# EAGLE board main_board_old (EAGLE 9.6.0)
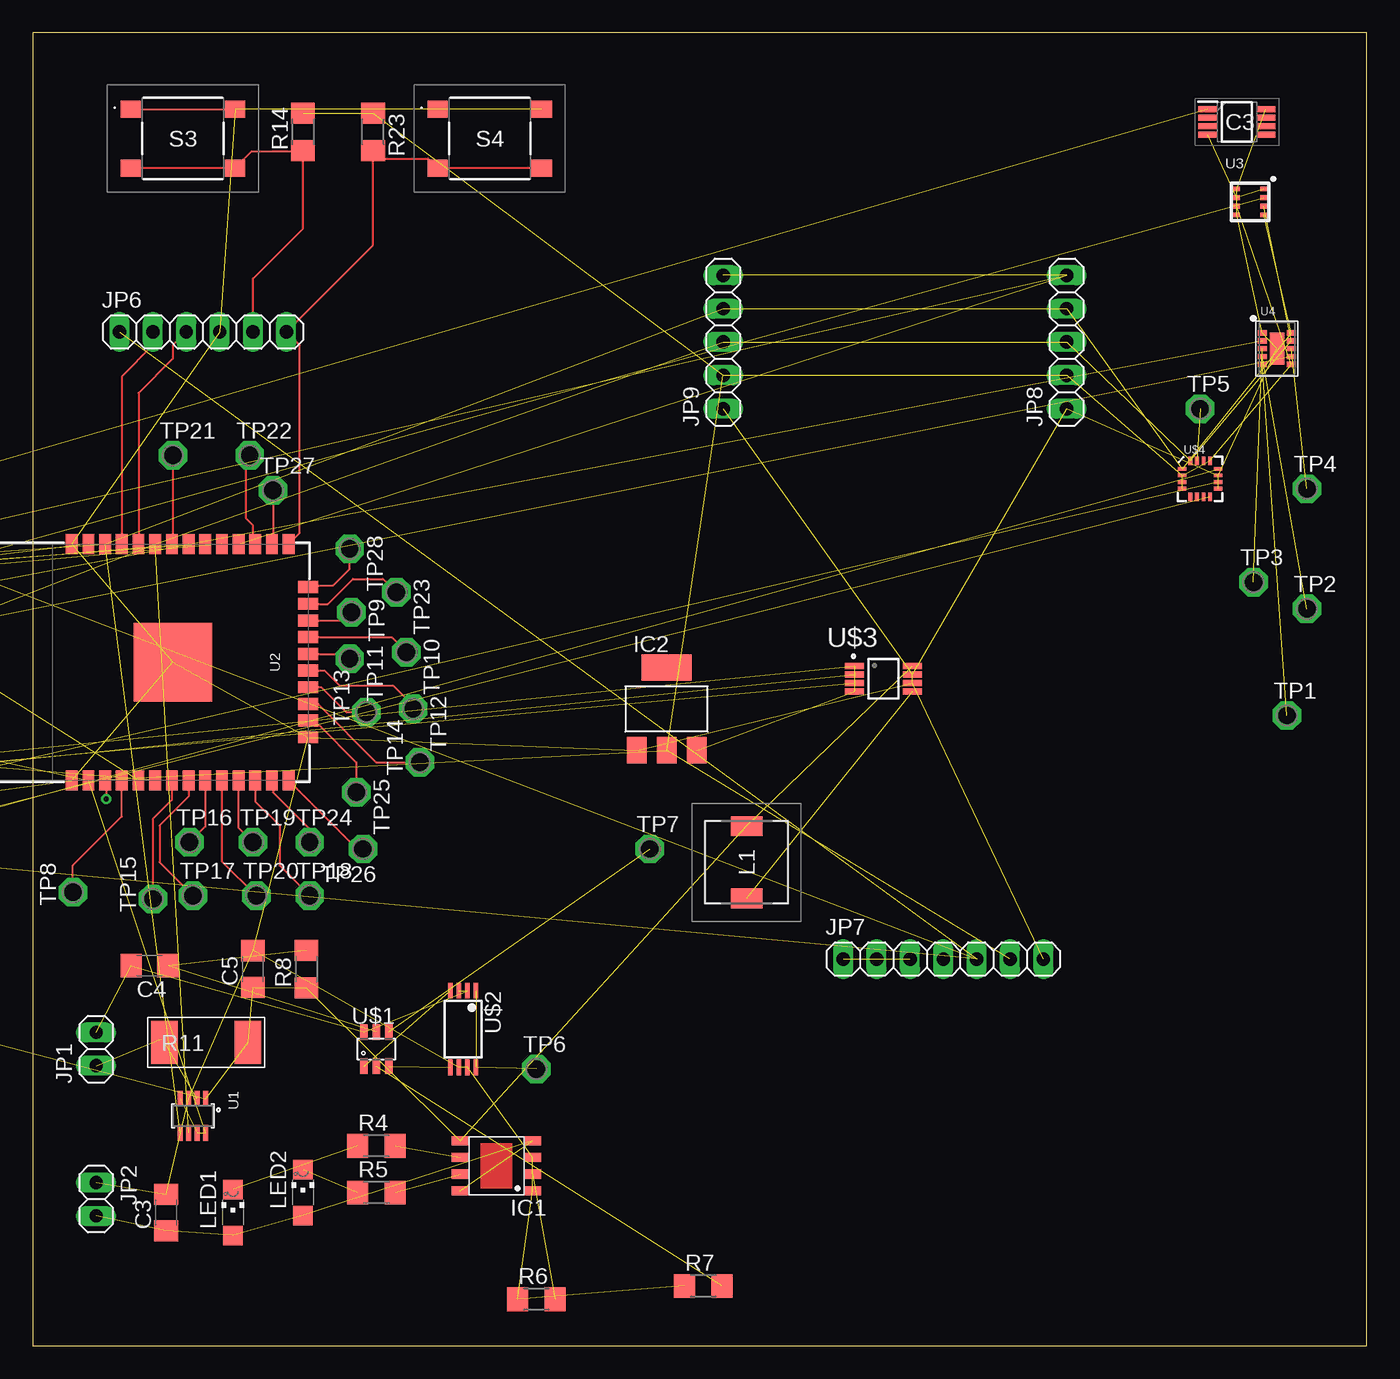
[diagram p0: board, top side]
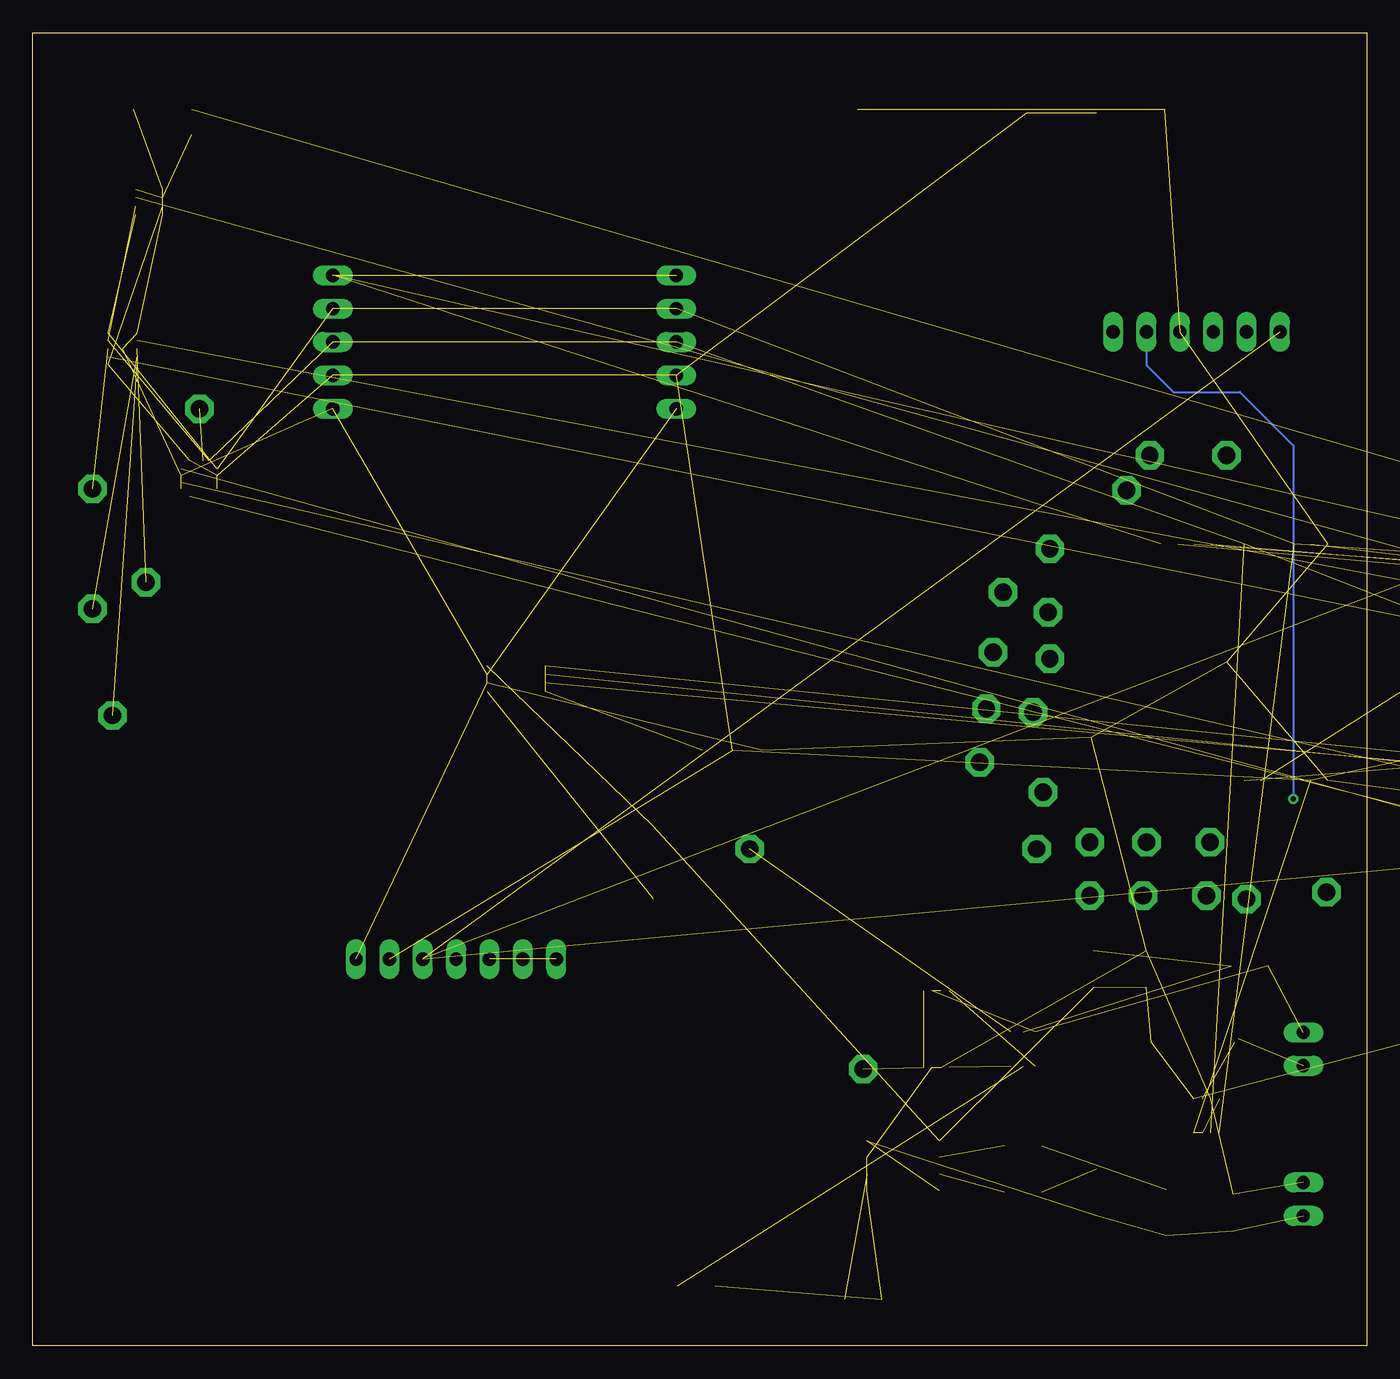
[diagram p1: board, bottom side, seen from below]

Size 101.58 x 100 mm. Coordinates in mm from the lower left corner, seen from the top.
Outline: 0,0 101.58,0 101.58,100 0,100 0,0
Copper layers (1*16): Top 0.035mm / dielectric 1.5mm / Bottom 0.035mm
Design rules "default": minimum track width 6mil, minimum drill 0.35mm, track to track 6mil, track to pad 6mil, pad to pad 6mil, via to via 6mil, smd to smd 6mil, copper to edge 40mil, drill to drill 6mil, minimum pad ring 10mil, minimum via ring 8mil, stop-mask expansion 4mil, vias tented up to drill 0mil, thermal gap 10mil

## Footprints (pad centres in the part's own frame; a part is rotated, then mirrored left to right if it is on the bottom)
C1206 = smd 1.6 x 1.8: 1 -1.4,0; 2 1.4,0
SOP-8 = smd 1.3 x 0.7: 1 -2.75,1.905; 2 -2.75,0.635; 3 -2.75,-0.635; 4 -2.75,-1.905; 5 2.75,-1.905; 6 2.75,-0.635; 7 2.75,0.635; 8 2.75,1.905
SOT223 = smd 1.499 x 2.007: 1 -2.261,-3.15; 2 0.025,-3.15; 3 2.311,-3.15 | smd 3.81 x 2.007: 4 0,3.15
SOP65P490X110-8N = smd 1.425 x 0.45: 1 -2.212,0.975; 2 -2.212,0.325; 3 -2.212,-0.325; 4 -2.212,-0.975; 5 2.212,-0.975; 6 2.212,-0.325; 7 2.212,0.325; 8 2.212,0.975
1X02 = drill 1.016 long: 1 -1.27,0; 2 1.27,0
1X08 = drill 1.016 long: 1 -8.89,0; 2 -6.35,0; 3 -3.81,0; 4 -1.27,0; 5 1.27,0; 6 3.81,0; 7 6.35,0; 8 8.89,0
1X03 = drill 1.016 long: 1 -2.54,0; 2 0,0; 3 2.54,0
1X06 = drill 1.016 long: 1 -6.35,0; 2 -3.81,0; 3 -1.27,0; 4 1.27,0; 5 3.81,0; 6 6.35,0
1X07 = drill 1.016 long: 1 -7.62,0; 2 -5.08,0; 3 -2.54,0; 4 0,0; 5 2.54,0; 6 5.08,0; 7 7.62,0
1X05 = drill 1.016 long: 1 -5.08,0; 2 -2.54,0; 3 0,0; 4 2.54,0; 5 5.08,0
B82462G4472M = smd 1.5 x 2.4: 1 -2.75,0; 2 2.75,0
CHIPLED_1206 = smd 1.5 x 1.5: A 0,-1.75; C 0,1.75
R1206 = smd 1.6 x 1.803: 1 -1.422,0; 2 1.422,0
R2512 = smd 2.032 x 3.302: 1 -3.175,0; 2 3.175,0
222AMVAAR = smd 1.55 x 1.3: 1 -3.975,2.25; 2 -3.975,-2.25; 3 3.975,2.25; 4 3.975,-2.25
P1-13 = drill 1.321 pad 2.159 octagon: TP 0,0
SOT23-8 = smd 1.2 x 0.4: 1 -1.3,0.975; 2 -1.3,0.325; 3 -1.3,-0.325; 4 -1.3,-0.975; 5 1.3,-0.975; 6 1.3,-0.325; 7 1.3,0.325; 8 1.3,0.975
ESP-WROOM-32 = smd 0.9 x 1.5: 1 7.7,9; 2 6.43,9; 3 5.16,9; 4 3.89,9; 5 2.62,9; 6 1.35,9; 7 0.08,9; 8 -1.19,9; 9 -2.46,9; 10 -3.73,9; 11 -5,9; 12 -6.27,9; 13 -7.54,9; 14 -8.81,9; 25 -8.81,-9; 26 -7.54,-9; 27 -6.27,-9; 28 -5,-9; 29 -3.73,-9; 30 -2.46,-9; 31 -1.19,-9; 32 0.08,-9; 33 1.35,-9; 34 2.62,-9; 35 3.89,-9; 36 5.16,-9; 37 6.43,-9; 38 7.7,-9 | smd 1.5 x 0.9: 15 -10.3,5.715; 16 -10.3,4.445; 17 -10.3,3.175; 18 -10.3,1.905; 19 -10.3,0.635; 20 -10.3,-0.635; 21 -10.3,-1.905; 22 -10.3,-3.175; 23 -10.3,-4.445; 24 -10.3,-5.715 | smd 6 x 6: GND 0,0
BME280_LGA = smd 0.5 x 0.35: P$1 1.025,0.975; P$2 1.025,0.325; P$3 1.025,-0.325; P$4 1.025,-0.975; P$5 -1.025,-0.975; P$6 -1.025,-0.325; P$7 -1.025,0.325; P$8 -1.025,0.975
LGA10 = smd 0.7 x 0.4: 1 -1.1,1.2; 2 -1.1,0.6; 3 -1.1,0; 4 -1.1,-0.6; 5 -1.1,-1.2; 6 1.1,-1.2; 7 1.1,-0.6; 8 1.1,0; 9 1.1,0.6; 10 1.1,1.2 | smd 1.1 x 2.45: EP 0,0
SOT23-6 = smd 0.55 x 1.2: 1 -0.95,-1.3; 2 0,-1.3; 3 0.95,-1.3; 4 0.95,1.3; 5 0,1.3; 6 -0.95,1.3
TSSOP8 = smd 1.2 x 0.35: 1 -2.925,0.975; 2 -2.925,0.325; 3 -2.925,-0.325; 4 -2.925,-0.975; 5 2.925,-0.975; 6 2.925,-0.325; 7 2.925,0.325; 8 2.925,0.975
MCP1642B = smd 1.45 x 0.45: EN -2.2,0.975; NC -2.2,0.325; PG -2.2,-0.325; PGND 2.2,-0.325; SGND 2.2,0.325; SW 2.2,-0.975; VIN 2.2,0.975; VOUT -2.2,-0.975
SPARKFUN_16LPCC = smd 0.65 x 0.28: 1 -1.37,0.75; 2 -1.37,0.25; 3 -1.37,-0.25; 4 -1.37,-0.75; 9 1.37,-0.75; 10 1.37,-0.25; 11 1.37,0.25; 12 1.37,0.75 | smd 0.28 x 0.65: 5 -0.75,-1.37; 6 -0.25,-1.37; 7 0.25,-1.37; 8 0.75,-1.37; 13 0.75,1.37; 14 0.25,1.37; 15 -0.25,1.37; 16 -0.75,1.37

## Placement (x,y rotation side)
C1  4.7uF  [C1206]  -39.37,33.02 0 top  (outside the outline)
C2  10uF  [C1206]  -22.86,40.64 0 top  (outside the outline)
C3  0.1uF  [C1206]  10.16,10.16 90 top
C4  0.1uF  [C1206]  8.89,28.96 180 top
C5  10uF  [C1206]  16.76,28.7 90 top
C6  0.1uF  [C1206]  -58.42,33.02 0 top  (outside the outline)
C7  0.1uF  [C1206]  -64.77,33.02 0 top  (outside the outline)
C8  0.1uF  [C1206]  -71.12,33.02 0 top  (outside the outline)
C9  4.7uF  [C1206]  -16.51,40.64 0 top  (outside the outline)
C10  0.22uF  [C1206]  -33.02,33.02 0 top  (outside the outline)
IC1  TP4056  [SOP-8]  35.31,13.72 180 top
IC2  REG1117  [SOT223]  48.26,48.51 0 top
IC3  DS18B20U+  [SOP65P490X110-8N]  91.69,93.22 0 top
JP1  [1X02]  4.83,22.61 90 top
JP2  [1X02]  4.83,11.18 270 top
JP3  [1X08]  -24.13,58.42 0 top  (outside the outline)
JP4  [1X03]  -17.78,64.77 0 top  (outside the outline)
JP5  [1X03]  -26.16,64.77 0 top  (outside the outline)
JP6  [1X06]  12.95,77.22 0 top
JP7  [1X07]  69.34,29.46 0 top
JP8  [1X05]  78.74,76.45 90 top
JP9  [1X05]  52.58,76.45 90 top
L1  B82462G4472M  [B82462G4472M]  54.36,36.83 270 top
LED1  GREEN  [CHIPLED_1206]  15.24,10.16 0 top
LED2  RED  [CHIPLED_1206]  20.57,11.68 0 top
R1  976k  [R1206]  -35.56,40.64 0 top  (outside the outline)
R2  309k  [R1206]  -41.91,40.64 0 top  (outside the outline)
R3  1M  [R1206]  -46.99,40.64 0 top  (outside the outline)
R4  1k  [R1206]  26.16,15.24 0 top
R5  1k  [R1206]  26.16,11.68 0 top
R6  1.2k  [R1206]  38.35,3.56 0 top
R7  1k  [R1206]  51.05,4.57 0 top
R8  100  [R1206]  20.83,28.7 90 top
R9  10k  [R1206]  -15.24,46.99 0 top  (outside the outline)
R10  10k  [R1206]  -20.32,46.99 0 top  (outside the outline)
R11  0.1R ±1%(PT2512FK-070R1L)  [R2512]  13.21,23.11 0 top
R12  4.7k  [R1206]  -25.4,46.99 0 top  (outside the outline)
R13  4.7k  [R1206]  -30.48,46.99 0 top  (outside the outline)
R14  10k  [R1206]  20.57,92.46 90 top
R15  4.7k  [R1206]  -40.64,46.99 0 top  (outside the outline)
R16  4.7k  [R1206]  -45.72,46.99 0 top  (outside the outline)
R17  4.7k  [R1206]  -50.8,46.99 0 top  (outside the outline)
R18  4.7k  [R1206]  -55.88,46.99 0 top  (outside the outline)
R19  10k  [R1206]  -60.96,46.99 0 top  (outside the outline)
R20  10k  [R1206]  -66.04,46.99 0 top  (outside the outline)
R21  4.7k  [R1206]  -71.12,46.99 0 top  (outside the outline)
R22  10k  [R1206]  -15.24,53.34 0 top  (outside the outline)
R23  10k  [R1206]  25.91,92.46 270 top
S3  222AMVAAR  [222AMVAAR]  11.43,91.95 0 top
S4  222AMVAAR  [222AMVAAR]  34.8,91.95 0 top
TP1  TPPAD1-13  [P1-13]  95.5,48.01 0 top
TP2  TPPAD1-13  [P1-13]  97.03,56.13 0 top
TP3  TPPAD1-13  [P1-13]  92.96,58.17 0 top
TP4  TPPAD1-13  [P1-13]  97.03,65.28 0 top
TP5  TPPAD1-13  [P1-13]  88.9,71.37 0 top
TP6  TPPAD1-13  [P1-13]  38.35,21.08 0 top
TP7  TPPAD1-13  [P1-13]  46.99,37.85 0 top
TP8  TPPAD1-13  [P1-13]  3.05,34.54 90 top
TP9  TPPAD1-13  [P1-13]  24.26,55.88 270 top
TP10  TPPAD1-13  [P1-13]  28.45,52.83 270 top
TP11  TPPAD1-13  [P1-13]  24.13,52.32 270 top
TP12  TPPAD1-13  [P1-13]  28.96,48.51 270 top
TP13  TPPAD1-13  [P1-13]  25.4,48.26 90 top
TP14  TPPAD1-13  [P1-13]  29.46,44.45 90 top
TP15  TPPAD1-13  [P1-13]  9.14,34.04 90 top
TP16  TPPAD1-13  [P1-13]  11.94,38.35 0 top
TP17  TPPAD1-13  [P1-13]  12.19,34.29 0 top
TP18  TPPAD1-13  [P1-13]  21.08,34.29 0 top
TP19  TPPAD1-13  [P1-13]  16.76,38.35 0 top
TP20  TPPAD1-13  [P1-13]  17.02,34.29 0 top
TP21  TPPAD1-13  [P1-13]  10.67,67.82 0 top
TP22  TPPAD1-13  [P1-13]  16.51,67.82 0 top
TP23  TPPAD1-13  [P1-13]  27.69,57.4 270 top
TP24  TPPAD1-13  [P1-13]  21.08,38.35 0 top
TP25  TPPAD1-13  [P1-13]  24.64,42.16 270 top
TP26  TPPAD1-13  [P1-13]  25.15,37.85 180 top
TP27  TPPAD1-13  [P1-13]  18.29,65.15 0 top
TP28  TPPAD1-13  [P1-13]  24.13,60.71 270 top
TP29  TPPAD1-13  [P1-13]  -32.51,73.91 0 top  (outside the outline)
TP30  TPPAD1-13  [P1-13]  -39.88,73.91 0 top  (outside the outline)
U1  [SOT23-8]  12.19,17.53 270 top
U2  ESP-WROOM-32  [ESP-WROOM-32]  10.67,52.07 180 top
U3  BME280  [BME280_LGA]  92.71,87.12 0 top
U4  CCS811  [LGA10]  94.74,75.95 0 top
U$1  DW01A  [SOT23-6]  26.16,22.61 0 top
U$2  FS8205A  [TSSOP8]  32.77,24.13 270 top
U$3  MCP1642B  [MCP1642B]  64.77,50.8 0 top
U$4  SPARKFUN_HMC5883LSMD  [SPARKFUN_16LPCC]  88.9,66.04 0 top

## Library data of the parts
C1-C10 LED1 LED2 R1-R10 R12-R23 = adafruit
IC1 = TP4056
IC2 = burr-brown; MPN: REG1117; OC_FARNELL: 1097566; OC_NEWARK: 14P6981
IC3 = SamacSys_Parts; DESCRIPTION: Board Mount Temperature Sensors Prgmble Resolution 1-Wire Parasite Pwr; HEIGHT: 1.1mm; MANUFACTURER_NAME: Maxim Integrated; MANUFACTURER_PART_NUMBER: DS18B20U+; MOUSER_PART_NUMBER: 700-DS18B20U; MOUSER_PRICE-STOCK: https://www.mouser.co.uk/ProductDetail/Maxim-Integrated/DS18B20U%2b?qs=7H2Jq%252ByxpJLxAEcPXZtrFQ%3D%3D
JP1-JP9 = pinhead
L1 = SamacSys_Parts; DESCRIPTION: EPCOS - B82462G4472M - Power Inductor (SMD), 4.7 H, 2 A, Shielded, 1.8 A, B82462G4 Series, 6.3mm x 6.3mm x 3mm; HEIGHT: 3mm; MANUFACTURER_NAME: TDK; MANUFACTURER_PART_NUMBER: B82462G4472M; MOUSER_PART_NUMBER: 871-B82462G4472M; MOUSER_PRICE-STOCK: https://www.mouser.co.uk/ProductDetail/EPCOS-TDK/B82462G4472M?qs=%2FkiEPUfD%2FqlqVwkhXJ4rDg%3D%3D
R11 = RCL_INA219
S3 S4 = SamacSys_Parts; DESCRIPTION: Tactile Switches Gull Wing AF 160gf Act. Dir. Vertical ,,; HEIGHT: 4.3mm; MANUFACTURER_NAME: CTS; MANUFACTURER_PART_NUMBER: 222AMVAAR; MOUSER_PART_NUMBER: 774-222AMVAAR; MOUSER_PRICE-STOCK: https://www.mouser.co.uk/ProductDetail/CTS-Electronic-Components/222AMVAAR?qs=%252BiOMRfgENTFbKNF5p%2FmyFQ%3D%3D
TP1-TP30 = testpad
U1 = IC_INA219
U2 = SparkFun-RF_ESP; PROD_ID: IC-13849
U3 = BME280ComponentLibrary; PROD_ID: IC-13090
U4 = CCS811_Breakout_Temp; PROD_ID: IC-13607
U$1 = DW01A
U$2 = SparkFun_FS8205A
U$3 = MCP1642B
U$4 = SparkFun_HMC5883L_Breakout_v12

## Nets
+3V3: C6.1 C7.1 C8.1 IC2.2 IC3.8 JP3.3 JP5.1 JP7.6 JP8.2 JP9.2 R9.2 R10.2 R12.2 R13.2 R14.2 R17.2 R18.1 R19.2 R20.1 R21.2 R23.1 U1.4 U1.7 U1.8 U2.2 U3.P$6 U3.P$8 U4.6 U$4.2 U$4.4 U$4.13
+5V: C2.1 IC2.3 JP4.1 JP6.1 JP7.5 R1.2 R3.1 U$3.EN U$3.VOUT
BATT+: C1.1 C5.1 IC1.5 L1.1 R8.1 R11.2 U1.1 U$3.VIN
BATT-: C4.2 JP1.2 U$1.6 U$2.2 U$2.3
GND: C1.2 C2.2 C3.2 C5.2 C6.2 C7.2 C8.2 C9.2 IC1.1 IC1.3 IC2.1 IC3.4 JP2.1 JP3.4 JP4.3 JP5.3 JP6.4 JP7.7 JP8.1 JP9.1 R2.1 R6.1 R7.1 R9.1 R10.1 R16.1 R18.2 R20.2 R22.1 S3.1 S3.3 S4.1 S4.3 U1.3 U2.1 U2.15 U2.38 U2.GND U3.P$1 U3.P$5 U3.P$7 U4.1 U4.EP U$2.6 U$2.7 U$3.PGND U$3.SGND U$4.9 U$4.11
GND1: JP7.4
GPIO17: IC3.1 JP8.5 JP9.5 R21.1 U2.28
N$1: R1.1 R2.2 U$3.NC
N$2: R3.2 U$3.PG
N$3: L1.2 U$3.SW
N$4: IC1.6 R4.2
N$5: IC1.7 R5.2
N$6: LED2.C R5.1
N$7: LED1.C R4.1
N$8: U$1.3 U$2.5
N$9: U$1.1 U$2.4
N$10: IC1.2 R6.2
N$11: R7.2 U$1.2
N$12: C4.1 R8.2 U$1.5
N$13: JP1.1 R11.1 U1.2
N$14: JP3.8 U2.29
N$15: JP3.7 U2.37
N$16: JP3.6 U2.31
N$17: JP3.5 U2.30
N$18: JP6.5 R14.1 S3.2 S3.4 U2.3
N$19: JP6.2 U2.35
N$20: JP6.3 U2.34
N$21: JP5.2 U2.5
N$22: JP6.6 R23.2 S4.2 S4.4 U2.25
N$23: JP4.2 R15.1
N$24: R15.2 R16.2 U2.6
N$25: R17.1 U3.P$2
N$26: R19.1 U4.2
N$27: C10.1 U$4.8
N$28: C10.2 U$4.12
N$29: R22.2 U4.7
N$30: C9.1 U$4.10
N$31: TP1.TP U4.5
N$32: TP2.TP U4.4
N$33: TP3.TP U4.3
N$34: TP4.TP U4.8
N$35: TP5.TP U$4.15
N$36: TP7.TP U$1.4
N$37: TP6.TP U$2.1 U$2.8
N$38: TP28.TP U2.24
N$39: TP27.TP U2.26
N$40: TP26.TP U2.14
N$41: TP25.TP U2.16
N$42: TP24.TP U2.13
N$43: TP23.TP U2.23
N$44: TP22.TP U2.27
N$45: TP21.TP U2.32
N$46: TP20.TP U2.10
N$47: TP19.TP U2.11
N$48: TP18.TP U2.12
N$49: TP17.TP U2.8
N$50: TP16.TP U2.9
N$51: TP15.TP U2.7
N$52: TP14.TP U2.17
N$53: TP13.TP U2.18
N$54: TP12.TP U2.19
N$55: TP11.TP U2.20
N$56: TP10.TP U2.21
N$57: TP9.TP U2.22
N$58: TP8.TP U2.4
SCL: JP3.1 JP8.4 JP9.4 R13.1 TP29.TP U1.5 U2.36 U3.P$4 U4.10 U$4.1
SDA: JP3.2 JP8.3 JP9.3 R12.1 TP30.TP U1.6 U2.33 U3.P$3 U4.9 U$4.16
SOLAR+: C3.1 IC1.4 IC1.8 JP2.2 LED1.A LED2.A
VCC: JP7.1 JP7.2 JP7.3

## Tracks (layer width: path | path; a pad name or v marks a point on that pad's centre or on a via)
+3V3  (30 unrouted)
+5V  (8 unrouted)
BATT+  (7 unrouted)
BATT-  (4 unrouted)
GND  (47 unrouted)
  Top 0.152: S3.1 S3.3
GPIO17  (4 unrouted)
N$1  (2 unrouted)
N$2  (1 unrouted)
N$3  (1 unrouted)
N$4  (1 unrouted)
N$5  (1 unrouted)
N$6  (1 unrouted)
N$7  (1 unrouted)
N$8  (1 unrouted)
N$9  (1 unrouted)
N$10  (1 unrouted)
N$11  (1 unrouted)
N$12  (2 unrouted)
N$13  (2 unrouted)
  Top 0.152: R11.1 9.78,23.37
N$14  (1 unrouted)
N$15  (1 unrouted)
N$16  (1 unrouted)
N$17  (1 unrouted)
N$18  (via drill 0.35)
  Top 0.152: JP6.5 16.76,81.28 20.57,85.09 R14.1 20.47,90.93 16.64,90.93 S3.4 S3.2 | U2.3 5.59,42.99 v5.59,41.66
  Bottom 0.152: JP6.5 16.76,74.68 14.73,72.64 9.65,72.64 5.59,68.58 v5.59,41.66
N$19
  Top 0.152: JP6.2 9.14,76.2 6.78,73.83 U2.35
N$20
  Top 0.152: JP6.3 10.67,76.2 10.67,75.18 8.05,72.56 U2.34
N$21  (1 unrouted)
N$22
  Top 0.152: U2.25 20.32,61.91 20.32,76.2 JP6.6 25.91,83.82 R23.2 26.52,90.42 30.1,90.42 S4.2 S4.4
N$23  (1 unrouted)
N$24  (2 unrouted)
N$25  (1 unrouted)
N$26  (1 unrouted)
N$27  (1 unrouted)
N$28  (1 unrouted)
N$29  (1 unrouted)
N$30  (1 unrouted)
N$31  (1 unrouted)
N$32  (1 unrouted)
N$33  (1 unrouted)
N$34  (1 unrouted)
N$35  (1 unrouted)
N$36  (1 unrouted)
N$37  (2 unrouted)
N$38
  Top 0.152: U2.24 21.09,57.91 22.86,57.91 24.13,59.18 TP28.TP
N$39
  Top 0.152: TP27.TP 18.29,61.15 U2.26
N$40
  Top 0.152: U2.14 24.7,37.85 TP26.TP
N$41
  Top 0.152: U2.16 21.35,47.24 21.84,47.24 24.64,44.45 TP25.TP
N$42
  Top 0.152: U2.13 18.29,42.99 18.29,42.16 21.08,39.37 TP24.TP
N$43
  Top 0.152: U2.23 22.48,56.52 24.38,58.42 26.67,58.42 TP23.TP
N$44
  Top 0.152: U2.27 16.76,61.24 16.76,62.48 16.26,62.99 16.26,67.56 TP22.TP
N$45
  Top 0.152: TP21.TP 10.67,61.15 U2.32
N$46
  Top 0.152: U2.10 14.4,36.91 TP20.TP
N$47
  Top 0.152: TP19.TP 15.67,39.45 U2.11
N$48
  Top 0.152: U2.12 16.94,41.48 18.8,39.62 18.8,36.58 TP18.TP
N$49
  Top 0.152: U2.8 11.86,41.83 9.65,39.62 9.65,36.83 TP17.TP
N$50
  Top 0.152: U2.9 13.13,39.54 TP16.TP
N$51
  Top 0.152: U2.7 10.59,41.58 9.14,40.13 TP15.TP
N$52
  Top 0.152: U2.17 21.72,48.9 26.16,44.45 TP14.TP
N$53
  Top 0.152: U2.18 21.97,50.16 23.88,48.26 TP13.TP
N$54
  Top 0.152: U2.19 22.23,51.44 23.37,50.29 27.43,50.29 28.96,48.77 TP12.TP
N$55
  Top 0.152: U2.20 23.75,52.7 TP11.TP
N$56
  Top 0.152: U2.21 27.3,53.98 TP10.TP
N$57
  Top 0.152: U2.22 23.62,55.24 TP9.TP
N$58
  Top 0.152: TP8.TP 3.05,36.58 6.78,40.31 U2.4
SCL  (9 unrouted)
SDA  (9 unrouted)
SOLAR+  (5 unrouted)
VCC  (2 unrouted)